# Altium PCB PCB4.PcbDoc (part 3 of 4)
Units mm, origin at the board's own origin, x right, y up, seen from the top; angles counter-clockwise.
Board outline 297 x 150 mm, 2 copper layers (Top Layer, Bottom Layer); 237 components, 147 nets, 681 pads, 111 vias.
Unrouted connection lines stored in the file: 7.
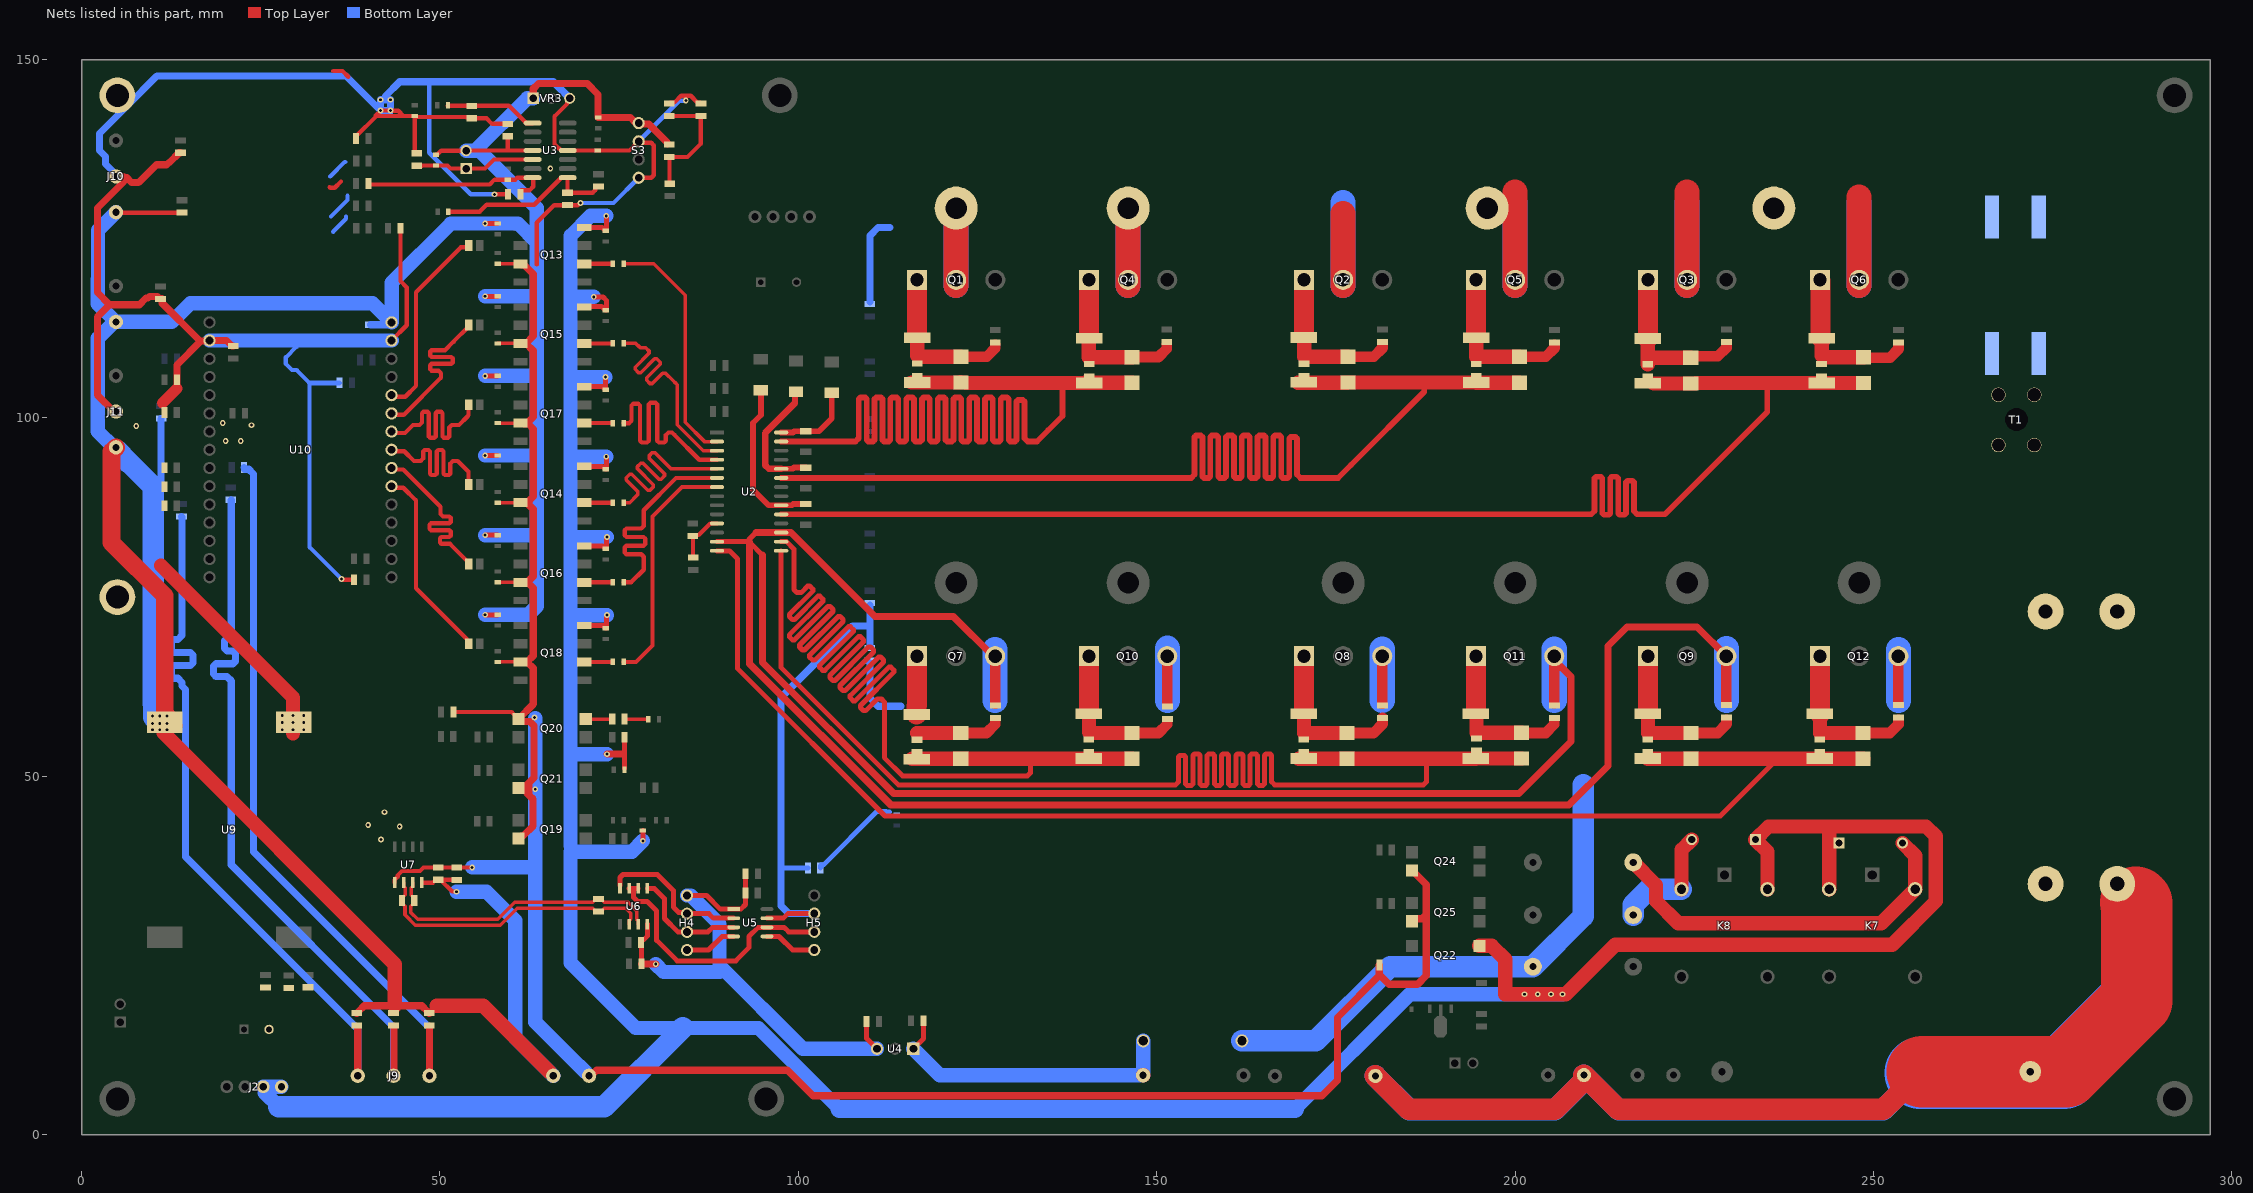
[diagram p2: the nets of this part, all layers, seen from the top]

## Via types
v1: diameter 0.8, hole 0.4, Top Layer to Bottom Layer, 111 vias

## Nets (pads, with @x,y where several pads share a name; then routed paths per layer and width w, separated by ;. In a path a pad name is that pad's centre, name@x,y a point inside that pad or via, vN(x,y) a via of type N, cw(c..) or ccw(c..) an arc to the next point about the centre after c; other vN are vias at no path point) (continued)
+5V_GATE_DRV: C7.2 C8.1 C9.1 C10.1 D18.1 D19.1 J2.1 J2.2 K7.2 K8.5 Q13.8 Q14.8 Q15.8 Q16.8 Q17.8 Q18.8 Q22.4 R65.2 R66.2 R67.2 R77.2 R78.2 R79.2 R83.2 R84.2 R91.2 | length 533.9
  Top Layer w0.7: Q18.8@70.125,71.042 72.71,71.042 73.075,70.677 R79.2@73.125,70.677 73.162,70.677 73.213,70.727 73.213,72.412 v1(73.3,72.5) ; Q16.8@70.125,82.151 72.691,82.151 73.075,81.767 R77.2@73.125,81.767 73.162,81.767 73.213,81.817 73.213,83.313 v1(73.3,83.4) ; Q14.8@70.125,93.26 72.672,93.26 73.075,92.857 R66.2@73.125,92.857 73.15,92.857 73.2,92.907 v1(73.2,94.6) ; Q17.8@70.125,104.369 72.653,104.369 73.075,103.947 73.113,103.984 73.113,105.688 v1(73.1,105.7) ; Q15.8@70.125,115.478 70.199,115.552 72.56,115.552 73.075,115.037 R67.2@73.125,115.037 73.15,115.037 73.2,115.087 73.2,116.417 72.736,116.881 71.481,116.881 v1(71.462,116.9) ; Q13.8@70.125,126.587 72.615,126.587 73.075,126.127 R65.2@73.125,126.127 73.15,126.127 73.2,126.177 v1(73.2,128.2) ; 75.591,53.1 75.766,53.275 ; R91.2@75.766,51.095 75.766,53.275 ; R84.2@75.766,55.455 75.766,53.275 ; v1(78.3,41) R83.2@78.3,42.45
  Top Layer w1: v1(73.3,53.1) 75.591,53.1
  Top Layer w2: Q22.4@195.015,26.345 196.755,26.345 198.6,24.5 198.6,19.6 v1(201.3,19.6) v1(203.15,19.6) v1(205,19.6) v1(206.6,19.6) 207.05,19.6 213.975,26.525 252.625,26.525 258.7,32.6 258.7,41.628 257.328,43 244.1,43 ; K8.5@235.2,34.25 235.2,39.49 D19.1@233.515,41.175 235.34,43 244.1,43 ; K7.2@243.8,34.25 243.8,42.7 244.1,43
  Bottom Layer w2: 27.529,3.9 25.57,5.859 25.57,6.47 J2.2@25.34,6.7 J2.1@27.88,6.7 ; 68.2,40.3 68.2,53 ; v1(71.462,116.9) 68.2,116.9 ; v1(73.1,105.7) 68.5,105.7 68.2,105.4 ; v1(73.2,94.6) 68.5,94.6 68.2,94.3 ; v1(73.2,128.2) 71,128.2 68.2,125.4 68.2,116.9 ; v1(73.3,53.1) 68.3,53.1 68.2,53 ; v1(73.3,72.5) 68.2,72.5 ; v1(73.3,83.4) 68.5,83.4 68.2,83.1 ; v1(78.3,41) 76.8,39.5 68.2,39.5 68.2,24 77.3,14.9 83.9,14.9 94.447,14.9 105.747,3.6 ; 169.3,3.6 185.3,19.6 v1(201.3,19.6) v1(203.15,19.6) v1(205,19.6) v1(206.6,19.6) ; 68.2,53 68.2,72.5 ; 68.2,72.5 68.2,83.1 ; 68.2,83.1 68.2,94.3 ; 68.2,94.3 68.2,105.4 ; 68.2,105.4 68.2,116.9
  Bottom Layer w2.5: 105.747,3.6 169.3,3.6
  Bottom Layer w3: 27.529,3.9 72.9,3.9 83.9,14.9
+5V_MCU: C19.1 C22.1 C23.1 C28.1 J4.2 J10.3 J11.3 J12.1 J13.2 pad.1@5,75 R36.2 R43.2 R44.2 R59.2 R60.2 R61.2 R71.2 R72.2 R73.2 R102.2 R103.2 R104.2 R105.2 R106.2 S3.1 U3.4 U7.8 U9.3 U10.15 VR3.1 | length 512
  Top Layer w0.6: J10.3@4.8,128.7 4.882,128.618 11.35,128.618 11.361,128.628 13.886,128.628 13.9,128.643 R105.2@14,128.643 ; U7.8@47.48,35.175 49.025,35.175 49.425,35.575 C22.1@49.75,35.575 50.075,35.575 C22.1@50.087,35.563 ; R44.2@49.45,136.725 49.6,136.725 50.175,137.3 J4.2@53.65,137.3 53.675,137.325 59.45,137.325 ; v1(52.3,33.9) 52.262,33.938 51.712,33.938 C22.1@50.087,35.563 ; C23.1@52.325,35.55 52.312,35.563 C22.1@50.087,35.563 ; C19.1@59.45,139.3 59.45,137.325 ; U3.4@62.925,137.325 59.45,137.325
  Top Layer w0.7: v1(56.3,72.542) R73.2@58.05,72.542 ; v1(56.3,83.651) R71.2@58.05,83.651 ; v1(56.3,94.76) R60.2@58.05,94.76 ; v1(56.3,105.869) R72.2@58.05,105.869 ; v1(56.3,116.978) R61.2@58.05,116.978 ; v1(56.3,127.125) R59.2@58.05,127.125
  Top Layer w1: R104.2@38.4,16.957 38.475,17.032 38.65,17.032 38.65,17.207 39.443,18 43.21,18 43.21,17.825 ; 43.71,18 47.457,18 48.25,17.207 48.25,17.032 48.425,17.032 R102.2@48.5,16.957 48.575,17.032 48.75,17.032 48.75,17.207 49.543,18 ; VR3.1@63.02,144.6 63.024,144.604 63.024,145.924 63.75,146.65 70.55,146.65 72.064,145.136 R43.2@72.064,141.936 ; R43.2@72.075,141.925 76.575,141.925 77.231,141.269 77.591,141.269 77.859,141.001 79.131,141.001 81.75,138.382 R36.2@81.75,138.207
  Top Layer w2: v1(11.9,57.4) v1(11.9,56.5) 11.85,56.45 11.45,56.05 43.71,23.79 43.71,18 ; U9.3@12.6,57.55 U9.3@13.1,57.05 ; 49.543,18 56.025,18 J12.1@65.318,8.707
  Top Layer w2.5: J11.3@4.8,95.9 4.196,95.296 4.196,82.604 11.6,75.2 11.6,58.7 v1(11.9,58.4)
  Bottom Layer w0.7: 63.5,105.869 64.006,105.869 64.175,105.7
  Bottom Layer w1: v1(9.9,57.4) 10.1,57.6 v1@10.1,58.267 ; 10.033,89.108 11.1,90.175 R106.2@11.1,99.943 ; C28.1@40.3,113 42.721,113 43.061,113.34 U10.15@43.25,113.34
  Bottom Layer w2: J11.3@4.8,95.9 4.5,95.9 2.275,98.125 2.275,111.1 4.575,113.4 J13.2@4.8,113.4 ; J10.3@4.8,128.7 2.3,126.2 2.3,119.378 2.275,119.353 2.275,115.925 J13.2@4.8,113.4 ; v1(9.9,58.4) v1(10.9,57.4) ; v1(52.3,33.9) 56.5,33.9 60.5,29.9 60.5,13.525 J12.1@65.8,8.225 ; J4.2@53.65,137.3 54.9,137.3 62.2,144.6 VR3.1@63.02,144.6 ; 55.2,137.6 63.5,129.3 63.5,124.5 ; v1(56.3,72.542) 62.328,72.542 63.5,73.714 63.5,83.8 ; v1(56.3,83.651) 63.351,83.651 63.5,83.8 ; v1(56.3,94.76) 63.26,94.76 63.5,95 ; v1(56.3,105.869) 63.5,105.869 ; v1(56.3,116.978) 63.478,116.978 63.5,117 ; J13.2@4.8,113.4 9.9,113.4 12.588,113.4 15.188,116 40.59,116 U10.15@43.25,113.34 43.25,118.85 51.525,127.125 v1(56.3,127.125) 60.875,127.125 63.5,124.5 ; 63.5,83.8 63.5,95 ; 63.5,95 63.5,105.869 ; 63.5,105.869 63.5,117 ; 63.5,117 63.5,124.5
  Bottom Layer w3: J11.3@4.957,95.443 6.616,93.784 10.033,90.367 10.033,89.108 10.033,60.157 10.1,60.09 v1@10.1,58.267 ; 10.1,59.2 10.4,58.9 v1(10.9,58.4)
  other v1: 9.9,56.5 10.9,56.5
+5V_VDD: C21.1 C24.1 C25.1 C26.1 C27.1 H4.1 U4.3 U5.1 U6.8 | length 74
  Top Layer w0.7: C26.1@78.1,23.85 78.1,26.775 C24.1@78.05,26.825 78.05,27.15 78.125,27.225 78.45,27.225 78.93,27.705 U6.8@78.93,29.375 ; H4.1@84.475,33.385 87.215,33.385 89.12,31.48 U5.1@90.982,31.48 91.98,31.48 92.625,32.125 C27.1@92.625,36.4 ; C21.1@109.525,15.8 109.525,13.435 U4.3@110.96,12
  Top Layer w1: C26.1@78.15,23.8 v1(80.1,23.8)
  Bottom Layer w2: v1(80.1,23.8) 81.2,22.7 89,22.7 ; H4.1@84.475,33.385 84.976,33.385 89,29.361 89,23.6 100.6,12 U4.3@110.96,12
+48V: C1.1 C2.1 HS1.1 HS2.1 J8.2 Q1.2 Q2.2 Q3.2 Q4.2 Q5.2 Q6.2 R34.2 R47.1 R48.2 R52.2 R96.2 | length 400.7
  Top Layer w3: R47.1@180.5,8.2 185.175,3.525 205.55,3.525 209.6,7.575 J8.2@209.6,8.325 214.4,3.525 251.35,3.525 256.841,8.8
  Top Layer w3.5: Q1.2@122.018,118.5 Q1.2@122.018,119.272 HS2.1@122.018,129.286 ; Q4.2@146,118.5 Q4.2@146,119.272 146,129.268 HS2.1@146.018,129.286 ; Q2.2@176,118.5 Q2.2@176,119.272 176,128.5 ; Q5.2@200,118.5 Q5.2@200,119.272 200,131.5 ; Q3.2@224,118.5 Q3.2@224,119.272 224,131.5 ; Q6.2@248,118.5 Q6.2@248,119.272 248,130.826
  Top Layer w10: 256.841,8.8 276.8,8.8 286.7,18.7 286.7,32.3 286.6,32.4
  Bottom Layer w1: R48.2@109.975,116.2 109.975,125.425 111.125,126.575 112.75,126.575
  Bottom Layer w3: R47.1@180.5,8.2 185.225,3.475 205.55,3.475 209.6,7.525 J8.2@209.6,8.325 214.425,3.5 251.375,3.5 256.5,8.625
  Bottom Layer w3.5: Q1.2@122.018,118.5 Q1.2@122.018,119.272 HS2.1@122.018,129.286 HS2.1@122.018,129.672 ; Q4.2@146,118.5 Q4.2@146,119.272 HS2.1@146,129.672 ; Q2.2@176,118.5 Q2.2@176,119.272 176,130.059 ; Q5.2@200,118.5 Q5.2@200,119.272 200,130.059 ; Q3.2@224,118.5 Q3.2@224,119.272 224,130.059 ; Q6.2@248,118.5 Q6.2@248,119.272 248,130.059
  Bottom Layer w10: 256.5,8.625 R96.2@271.7,8.625 ; R96.2@272.05,8.625 276.5,8.625 285.696,17.821
COM: C1.2 C2.2 C29.2 D16.2 Q7.3 Q8.3 Q9.3 Q10.3 Q11.3 Q12.3 R16.2 R17.2 R18.2 R22.2 R23.2 R24.2 R34.1 R52.1 R56.1 R88.1 R99.1 T1.1 U2.13 U2.17 | length 561
  Top Layer w0.7: U2.13@88.647,82.74 92.815,82.74 92.962,82.887 93.187,83.113 94.085,84.01 ; 93.2,82.65 95,80.85 ; Q7.3@127.149,66.773 Q7.3@127.46,66.773 ; Q11.3@205.46,66.204 Q11.3@205.46,66.773
  Top Layer w1: 93.2,82.65 93.2,65.7 112.875,46.025 207.525,46.025 212.95,51.45 212.95,68.2 215.6,70.85 225.382,70.85 Q9.3@229.46,66.773 ; 94.085,84.01 98.99,84.01 110.7,72.3 121.621,72.3 Q7.3@127.149,66.773 ; 95,80.85 95,65.9 113.3,47.6 200.525,47.6 207.775,54.85 207.775,63.889 Q11.3@205.46,66.204
  Top Layer w1.5: R16.2@127.46,60.175 Q7.3@127.46,66.773 ; R22.2@151.46,60.175 Q10.3@151.46,66.773 ; R17.2@181.46,60.175 Q8.3@181.46,66.773 ; R23.2@205.46,60.2 Q11.3@205.46,66.204 ; 229.46,60.5 Q9.3@229.46,66.773 ; R24.2@253.46,60.3 Q12.3@253.46,66.773
  Bottom Layer w0.7: C29.2@103.057,37.2 103.057,37.525 103.132,37.6 103.457,37.6 110.957,45.1 112.2,45.1 112.3,45 112.7,45
  Bottom Layer w1: R56.1@109.975,65.775 109.975,60.925 111.125,59.775 114.3,59.775
  Bottom Layer w3: D16.2@161.887,13.1 172.2,13.1 182.55,23.45 R99.1@202.475,23.45 209.475,30.45 209.475,48.8
  Bottom Layer w3.5: 127.46,60.586 Q7.3@127.46,66.773 Q7.3@127.46,67.725 ; 151.478,60.586 151.478,66.773 Q10.3@151.478,67.875 ; 181.46,60.586 Q8.3@181.46,66.773 Q8.3@181.46,67.775 ; 205.46,60.586 Q11.3@205.46,66.773 Q11.3@205.46,67.75 ; 229.478,60.586 229.478,66.773 Q9.3@229.478,67.825 ; 253.46,60.586 Q12.3@253.46,66.773 Q12.3@253.46,67.725
D_N: R57.1 R58.1 U6.6 U7.6 | length 40.4
  Top Layer w0.5: U7.6@44.94,35.175 44.94,34.675 45.175,34.44 45.175,33.5 44.675,33 44.675,32.35 45.125,31.9 45.125,30.675 46.55,29.25 58.406,29.25 60.773,31.616 71.334,31.616 71.8,31.15 R57.1@72.125,31.15 72.45,31.15 72.916,31.616 75.927,31.616 76.625,30.918 76.625,30.11 76.39,29.875 U6.6@76.39,29.375
D_P: R57.2 R58.2 U6.7 U7.7 | length 40.4
  Top Layer w0.5: U7.7@46.21,35.175 46.21,34.675 45.975,34.44 45.975,33.432 46.407,33 46.407,32.35 45.925,31.868 45.925,31.006 46.881,30.05 58.075,30.05 60.441,32.416 71.334,32.416 71.8,32.882 R57.2@72.125,32.882 72.45,32.882 72.916,32.416 76.258,32.416 77.425,31.249 77.425,30.11 77.66,29.875 U6.7@77.66,29.375
H03: D3.1 D6.1 pad.2@218.5,105.768 pad.2@242.75,105.793 R3.1 R9.1 U2.19 | length 205.4
  Top Layer w0.8: U2.19@97.603,86.55 210.2,86.55 210.6,86.55 211.069,87.019 211.069,91.576 211.289,91.796 211.949,91.796 212.169,91.576 212.169,86.72 212.389,86.5 213.049,86.5 213.269,86.72 213.269,91.576 213.489,91.796 214.149,91.796 214.369,91.576 214.369,86.72 214.589,86.5 215.249,86.5 215.469,86.72 215.469,91.021 215.689,91.241 216.349,91.241 216.569,91.021 216.569,87.019 217.037,86.55 218.6,86.55 220.875,86.55 235.175,100.85 235.175,104.875
  Top Layer w2: R3.1@219.35,104.8 D3.1@224.45,104.8 ; D3.1@224.55,104.8 225.136,104.8 225.211,104.875 235.175,104.875 R9.1@242.75,104.875 248.55,104.875 248.552,104.877 D6.1@248.6,104.877
HALL_1: J9.3 R102.1 R119.2 | length 102.8
  Top Layer w1: J9.3@48.525,8.225 R102.1@48.525,15.15
  Bottom Layer w1: R119.2@22.682,93.1 22.757,93.025 22.757,92.85 23.314,92.85 23.975,92.189 23.975,39.475 48.525,14.925 J9.3@48.525,8.225
HALL_2: J9.2 R103.1 R122.2 | length 102.6
  Top Layer w1: J9.2@43.525,8.225 43.587,8.288 R103.1@43.587,15.138
  Bottom Layer w1: R122.2@20.885,88.518 20.885,74.625 20.885,69.897 20.3,69.311 19.94,68.951 19.94,67.871 20.3,67.511 21.092,67.511 21.452,67.151 21.452,66.071 21.092,65.711 18.771,65.711 18.411,65.351 18.411,64.271 18.771,63.911 20.3,63.911 20.885,63.325 20.885,62.825 20.885,37.665 43.525,15.025 J9.2@43.525,8.225
HALL_3: J9.1 R104.1 R120.2 | length 102.3
  Top Layer w1: J9.1@38.525,8.225 R104.1@38.525,15.1
  Bottom Layer w1: R120.2@13.925,86.243 13.95,86.243 14.025,86.168 14.025,75.719 14.025,69.672 13.439,69.086 12.861,69.086 12.501,68.726 12.501,67.646 12.861,67.286 15.189,67.286 15.549,66.926 15.549,65.846 15.189,65.486 12.861,65.486 12.501,65.126 12.501,64.046 12.861,63.686 13.439,63.686 14.025,63.1 14.025,62.6 14.5,62.125 14.5,38.775 38.525,14.75 J9.1@38.525,8.225
HIN1: Q13.6 R26.1 | length 4
  Top Layer w0.6: Q13.6@70.125,121.507 R26.1@74.125,121.507
HIN1_GD: R26.2 U2.2 | length 33.7
  Top Layer w0.5: R26.2@75.625,121.507 79.818,121.507 84.225,117.1 84.225,99.383 86.898,96.71 U2.2@88.647,96.71
HIN1_MCU: R62.1 U10.11 | length 27.3
  Top Layer w0.6: U10.11@43.25,103.18 43.46,102.97 45.145,102.97 46.65,104.475 46.65,117.55 52.919,123.819 53.768,123.819 53.993,124.044 R62.1@53.993,124.077
HIN2: Q15.6 R28.1 | length 4
  Top Layer w0.6: Q15.6@70.125,110.398 R28.1@74.125,110.398
HIN2_GD: R28.2 U2.3 | length 33.7
  Top Layer w0.5: R28.2@75.625,110.398 77.327,110.398 77.765,109.96 77.942,109.783 78.356,109.783 78.385,109.812 78.696,109.812 79.163,109.345 79.163,109.034 77.224,107.096 77.224,106.785 77.691,106.318 78.002,106.318 79.941,108.256 80.252,108.256 80.718,107.79 80.718,107.479 78.831,105.591 78.831,105.28 79.297,104.813 79.608,104.813 81.053,106.258 81.467,106.258 82.61,105.115 82.787,104.938 83.1,104.625 83.1,99.05 86.71,95.44 U2.3@88.647,95.44
HIN2_MCU: R64.1 U10.10 | length 26.9
  Top Layer w0.6: U10.10@43.25,100.64 43.46,100.43 44.955,100.43 50.15,105.625 50.15,105.95 50.15,106.25 49.799,106.601 48.816,106.601 48.626,106.791 48.626,107.361 48.816,107.551 51.586,107.551 51.776,107.741 51.776,108.311 51.586,108.501 48.816,108.501 48.626,108.691 48.626,109.261 48.816,109.451 50.707,109.451 51.906,110.65 53.993,112.737 R64.1@53.993,112.962
HIN3: Q17.6 R30.1 | length 4
  Top Layer w0.6: Q17.6@70.125,99.289 R30.1@74.125,99.289
HIN3_GD: R30.2 U2.4 | length 33.7
  Top Layer w0.6: R30.2@75.625,99.289 75.625,99.275 75.675,99.275 76.368,99.275 76.72,99.626 76.72,101.73 76.96,101.97 77.68,101.97 77.92,101.73 77.92,96.811 78.16,96.571 78.88,96.571 79.12,96.811 79.12,101.886 79.36,102.126 80.08,102.126 80.32,101.886 80.32,96.811 80.56,96.571 81.28,96.571 81.52,96.811 81.52,97.63 81.871,97.982 82.368,97.982 82.668,97.682 86.18,94.17 U2.4@88.647,94.17
HIN3_MCU: R75.1 U10.9 | length 26.5
  Top Layer w0.6: U10.9@43.25,98.1 43.46,97.89 45.115,97.89 46.25,99.025 46.85,99.025 47.15,99.025 47.501,99.376 47.501,100.667 47.691,100.857 48.261,100.857 48.451,100.667 48.451,97.421 48.641,97.231 49.211,97.231 49.401,97.421 49.401,100.667 49.591,100.857 50.161,100.857 50.351,100.667 50.351,97.421 50.541,97.231 51.111,97.231 51.301,97.421 51.301,98.674 51.653,99.025 52.65,99.025 53.8,100.175 53.993,100.368 R75.1@53.993,101.847
HO1: D1.1 D4.1 pad.2@116.586,105.87 pad.2@140.6,105.793 R1.1 R7.1 U2.27 | length 205.4
  Top Layer w0.8: U2.27@97.603,96.71 107.569,96.71 107.969,96.71 108.437,97.179 108.437,102.647 108.657,102.867 109.317,102.867 109.537,102.647 109.537,96.93 109.757,96.71 110.417,96.71 110.637,96.93 110.637,102.647 110.857,102.867 111.517,102.867 111.737,102.647 111.737,96.93 111.957,96.71 112.617,96.71 112.837,96.93 112.837,102.647 113.057,102.867 113.717,102.867 113.937,102.647 113.937,96.93 114.157,96.71 114.817,96.71 115.037,96.93 115.037,102.647 115.257,102.867 115.917,102.867 116.137,102.647 116.137,96.93 116.357,96.71 117.017,96.71 117.237,96.93 117.237,102.647 117.457,102.867 118.117,102.867 118.337,102.647 118.337,96.93 118.557,96.71 119.217,96.71 119.437,96.93 119.437,102.647 119.657,102.867 120.317,102.867 120.537,102.647 120.537,96.93 120.757,96.71 121.417,96.71 121.637,96.93 121.637,102.647 121.857,102.867 122.517,102.867 122.737,102.647 122.737,96.93 122.957,96.71 123.617,96.71 123.837,96.93 123.837,102.647 124.057,102.867 124.717,102.867 124.937,102.647 124.937,96.93 125.157,96.71 125.817,96.71 126.037,96.93 126.037,102.647 126.257,102.867 126.917,102.867 127.137,102.647 127.137,96.93 127.357,96.71 128.017,96.71 128.237,96.93 128.237,102.647 128.457,102.867 129.117,102.867 129.337,102.647 129.337,96.93 129.557,96.71 130.217,96.71 130.437,96.93 130.437,102.283 130.657,102.503 131.317,102.503 131.537,102.283 131.537,97.179 132.006,96.71 133.285,96.71 134.811,98.236 136.85,100.275 136.85,104.875
  Top Layer w2: R1.1@115.8,104.952 R1.1@116.586,104.952 122.577,104.952 122.625,105 D1.1@122.675,105 ; D1.1@122.725,104.952 123.311,104.952 123.388,104.875 136.85,104.875 R7.1@140.6,104.875 ; R7.1@140,104.893 D4.1@146.549,104.893
HO2: D2.1 D5.1 pad.2@170.558,105.835 pad.2@194.558,105.818 R2.1 R8.1 U2.23 | length 205.4
  Top Layer w0.8: U2.23@97.603,91.63 154.4,91.63 154.8,91.63 155.269,92.099 155.269,97.334 155.489,97.554 156.149,97.554 156.369,97.334 156.369,91.85 156.589,91.63 157.249,91.63 157.469,91.85 157.469,97.334 157.689,97.554 158.349,97.554 158.569,97.334 158.569,91.85 158.789,91.63 159.449,91.63 159.669,91.85 159.669,97.334 159.889,97.554 160.549,97.554 160.769,97.334 160.769,91.85 160.989,91.63 161.649,91.63 161.869,91.85 161.869,97.334 162.089,97.554 162.749,97.554 162.969,97.334 162.969,91.85 163.189,91.63 163.849,91.63 164.069,91.85 164.069,97.334 164.289,97.554 164.949,97.554 165.169,97.334 165.169,91.85 165.389,91.63 166.049,91.63 166.269,91.85 166.269,97.334 166.489,97.554 167.149,97.554 167.369,97.334 167.369,91.85 167.589,91.63 168.249,91.63 168.469,91.85 168.469,97.128 168.689,97.348 169.349,97.348 169.569,97.128 169.569,92.099 170.037,91.63 175.305,91.63 177.1,93.425 187.325,103.65 187.325,104.952
  Top Layer w2: R2.1@169.7,104.927 D2.1@176.577,104.927 ; D2.1@176.657,104.952 187.325,104.952 194.539,104.952 194.564,104.927 D5.1@200.577,104.927
LIN1: Q14.6 R27.1 | length 4
  Top Layer w0.6: Q14.6@70.125,88.18 R27.1@74.125,88.18
LIN1_GD: R27.2 U2.5 | length 33.7
  Top Layer w0.5: R27.2@75.625,88.18 76.455,88.18 77.425,89.15 77.602,89.327 77.602,89.741 75.991,91.352 75.991,91.663 76.457,92.13 76.769,92.13 78.993,89.906 79.304,89.906 79.77,90.372 79.77,90.684 77.546,92.908 77.546,93.219 78.013,93.685 78.324,93.685 80.548,91.461 80.859,91.461 81.326,91.928 81.326,92.239 79.17,94.395 79.17,94.706 79.637,95.173 79.948,95.173 82.221,92.9 83.65,92.9 U2.5@88.647,92.9
LIN1_MCU: R63.1 U10.8 | length 26.4
  Top Layer w0.6: U10.8@43.25,95.56 43.46,95.35 45.025,95.35 46.375,94 47,94 47.3,94 47.651,94.351 47.651,95.334 47.841,95.524 48.411,95.524 48.601,95.334 48.601,92.229 48.791,92.039 49.361,92.039 49.551,92.229 49.551,95.334 49.741,95.524 50.311,95.524 50.501,95.334 50.501,92.229 50.691,92.039 51.261,92.039 51.451,92.229 51.451,93.649 51.803,94 52.475,94 53.95,92.525 53.993,92.482 R63.1@53.993,90.732
LIN2: Q16.6 R29.1 | length 4
  Top Layer w0.6: Q16.6@70.125,77.071 R29.1@74.125,77.071
LIN2_GD: R29.2 U2.6 | length 33.7
  Top Layer w0.6: R29.2@75.625,77.071 76.671,77.071 78.423,78.823 78.423,80.334 78.423,80.634 78.072,80.985 76.005,80.985 75.765,81.225 75.765,81.945 76.005,82.185 78.397,82.185 78.637,82.425 78.637,83.145 78.397,83.385 76.024,83.385 75.784,83.625 75.784,84.345 76.024,84.585 78.072,84.585 78.423,84.936 78.423,86.537 78.423,87.123 82.93,91.63 U2.6@88.647,91.63
LIN2_MCU: R74.1 U10.7 | length 27.2
  Top Layer w0.6: U10.7@43.25,93.02 43.46,92.81 44.89,92.81 50.075,87.625 50.075,86.9 50.075,86.6 50.426,86.249 51.302,86.249 51.492,86.059 51.492,85.489 51.302,85.299 48.741,85.299 48.551,85.109 48.551,84.539 48.741,84.349 51.302,84.349 51.492,84.159 51.492,83.589 51.302,83.399 50.183,83.399 49.993,83.209 49.993,82.639 50.183,82.449 51.386,82.449 51.76,82.075 53.993,79.842 R74.1@53.993,79.617
LIN3: Q18.6 R31.1 | length 4
  Top Layer w0.6: Q18.6@70.125,65.962 R31.1@74.125,65.962
LIN3_GD: R31.2 U2.7 | length 33.7
  Top Layer w0.6: R31.2@75.625,65.962 75.625,65.95 77.35,65.95 79.65,68.25 79.65,86.256 83.754,90.36 U2.7@88.647,90.36
LIN3_MCU: R76.1 U10.6 | length 27.3
  Top Layer w0.6: U10.6@43.25,90.48 43.46,90.27 44.88,90.27 46.65,88.5 46.65,76.25 53.768,69.132 53.768,68.727 R76.1@53.993,68.502
LO1: D7.1 D10.1 pad.2@116.55,53.375 pad.2@140.5,53.393 R13.1 R19.1 U2.16 | length 205.4
  Top Layer w0.7: U2.16@97.603,82.74 98.36,82.74 99.4,81.7 99.4,76.538 99.4,76.043 99.81,75.633 100.39,75.633 101.305,76.548 101.588,76.548 102.012,76.124 102.012,75.841 98.744,72.573 98.744,72.29 99.169,71.866 99.452,71.866 102.719,75.134 103.002,75.134 103.426,74.709 103.426,74.426 98.744,69.745 98.744,69.462 99.169,69.038 99.452,69.038 104.133,73.719 104.416,73.719 104.84,73.295 104.84,73.012 100.151,68.323 100.151,68.04 100.575,67.616 100.858,67.616 105.548,72.305 105.83,72.305 106.255,71.881 106.255,71.598 101.565,66.909 101.565,66.626 101.99,66.202 102.272,66.202 106.962,70.891 107.245,70.891 107.669,70.467 107.669,70.184 102.98,65.495 102.98,65.212 103.404,64.787 103.687,64.787 108.376,69.477 108.659,69.477 109.083,69.052 109.083,68.77 104.394,64.08 104.394,63.797 104.818,63.373 105.101,63.373 109.79,68.063 110.073,68.063 110.497,67.638 110.497,67.355 105.808,62.666 105.808,62.383 106.232,61.959 106.515,61.959 111.204,66.648 111.487,66.648 111.911,66.224 111.911,65.941 107.222,61.252 107.222,60.969 107.646,60.545 107.929,60.545 112.619,65.234 112.901,65.234 113.326,64.81 113.326,64.527 108.673,59.875 108.673,59.592 109.098,59.168 109.381,59.168 111.01,60.797 111.59,60.797 112,60.387 112,56.6 112,52.6 114.525,50.075 131.965,50.075 132.375,50.485 132.375,52.452
  Top Layer w2: R13.1@115.9,52.452 D7.1@122.657,52.452 132.375,52.452 140.477,52.452 R19.1@140.5,52.475 146.486,52.475 146.509,52.452 D10.1@146.536,52.452
LO2: D8.1 D11.1 pad.2@170.5,53.393 pad.2@194.6,53.568 R14.1 R20.1 U2.15 | length 205.4
  Top Layer w0.7: U2.15@97.603,81.47 97.603,65.172 113.95,48.825 152.129,48.825 152.63,48.825 153.04,49.235 153.04,52.709 153.24,52.909 153.84,52.909 154.04,52.709 154.04,48.95 154.24,48.75 154.84,48.75 155.04,48.95 155.04,52.933 155.24,53.133 155.84,53.133 156.04,52.933 156.04,48.95 156.24,48.75 156.84,48.75 157.04,48.95 157.04,52.933 157.24,53.133 157.84,53.133 158.04,52.933 158.04,48.95 158.24,48.75 158.84,48.75 159.04,48.95 159.04,52.933 159.24,53.133 159.84,53.133 160.04,52.933 160.04,48.95 160.24,48.75 160.84,48.75 161.04,48.95 161.04,52.933 161.24,53.133 161.84,53.133 162.04,52.933 162.04,48.95 162.24,48.75 162.84,48.75 163.04,48.95 163.04,52.933 163.24,53.133 163.84,53.133 164.04,52.933 164.04,48.95 164.24,48.75 164.84,48.75 165.04,48.95 165.04,52.933 165.24,53.133 165.84,53.133 166.04,52.933 166.04,49.235 166.45,48.825 167.8,48.825 187.215,48.825 187.625,49.235 187.625,52.452
  Top Layer w2: R14.1@169.8,52.452 D8.1@176.559,52.452 187.625,52.452 194.477,52.452 R20.1@194.5,52.475 ; R20.1@193.9,52.5 D11.1@200.9,52.5
LO3: D9.1 D12.1 pad.2@218.5,53.393 pad.2@242.5,53.393 R15.1 R21.1 U2.14 | length 205.4
  Top Layer w0.7: U2.14@88.647,81.47 90.38,81.47 91.525,80.325 91.525,65.025 112.075,44.475 228.625,44.475 236.075,51.925 236.075,52.452
  Top Layer w2: R15.1@218.5,52.475 218.545,52.475 218.568,52.452 D9.1@224.559,52.452 236.075,52.452 R21.1@242.477,52.452 ; R21.1@242.5,52.475 R21.1@242.477,52.452 ; D12.1@248.559,52.452 R21.1@242.477,52.452
MCU_GND: C15.2 C16.2 C17.2 C18.2 C19.2 C22.2 C23.2 C28.2 J10.2 J11.2 J12.2 pad.1@5,145 Q13.3 Q14.3 Q15.3 Q16.3 Q17.3 Q18.3 Q19.2 Q20.3 Q21.2 Q24.2 Q25.2 R40.1 R41.1 R45.1 R46.2 R68.1 R69.1 R70.1 R80.1 R81.1 R82.1 R94.1 R107.1 R108.1 R111.1 R112.1 R116.1 R117.1 R118.1 R126.1 R127.1 R128.1 R129.1 R130.1 R131.1 S3.2 S3.4 U3.11 U7.5 U9.4 U10.14 U10.17 VR3.3 | length 767.9
  Top Layer w0.5: R82.1@58.05,65.962 Q18.3@61.225,65.962 ; R80.1@58.05,77.071 Q16.3@61.225,77.071 ; R69.1@58.05,88.18 Q14.3@61.225,88.18 ; R81.1@58.05,99.289 Q17.3@61.225,99.289 ; R70.1@58.05,110.398 Q15.3@61.225,110.398 ; R68.1@58.05,121.507 Q13.3@61.225,121.507
  Top Layer w0.6: R129.1@11.55,100.775 11.55,102.1 ; 34.6,132.2 34.687,132.113 35.313,132.113 36.202,133.002 ; 35.1,148.4 36.4,148.4 37.2,147.6 ; v1(36.263,77.518) 36.317,77.518 36.41,77.425 R116.1@38.018,77.425 ; R128.1@38.3,139.3 41.125,142.125 44.925,142.125 ; 41.052,142.198 41.7,142.846 v1(41.7,142.9) v1(43.1,142.9) 43.138,142.862 44.188,142.862 44.925,142.125 ; U10.14@43.25,110.8 45.375,112.925 45.375,118.212 44.5,119.087 R111.1@44.5,126.45 ; U7.5@43.67,35.175 43.67,35.575 44.09,35.995 44.09,36.174 44.716,36.799 47.224,36.799 47.707,37.282 C23.2@52.325,37.282 52.334,37.291 54.483,37.291 v1(54.492,37.3) ; R41.1@46.625,142.125 46.75,142 53.649,142 53.706,141.943 54.325,141.943 C17.2@54.45,141.818 56.495,141.818 57.28,141.032 C19.2@59.45,141.032 ; R45.1@46.75,136.925 46.6,136.925 46.475,137.05 R41.1@46.475,142.125 44.925,142.125 ; R131.1@51.875,58.975 59.995,58.975 Q20.3@60.96,58.01 ; v1(57.6,131.2) C18.2@59.518,131.2 ; 63.5,121.4 63.5,127.25 65.943,129.693 69.238,129.693 69.546,130 v1(69.6,130) ; VR3.3@68.1,144.6 68.1,144.343 67.716,143.959 67.716,143.816 65.975,142.075 65.975,138.201 66.531,137.645 66.578,137.645 66.898,137.325 U3.11@67.825,137.325 R46.2@72.025,137.325 76.455,137.325 S3.2@77.725,138.595 77.935,138.385 79.474,138.385 79.825,138.033 79.825,133.866 79.474,133.515 S3.4@77.725,133.515 ; R40.1@82.018,143.857 82.16,144 82.7,144 83.647,144.947 84.985,144.947 85.95,143.982 86.275,143.982 C15.2@86.4,143.857 ; v1(84.3,144.3) 84.3,144.9
  Top Layer w1: J11.2@4.8,100.9 4.529,100.9 3.265,102.164 3.236,102.164 2.2,103.2 2.2,114.1 3.9,115.8 ; J10.2@4.8,133.7 5.859,133.7 5.859,132.923 2.211,129.275 2.211,117.489 3.9,115.8 ; 6.309,133.509 6.964,132.854 7.964,132.854 10.436,135.325 11.85,135.325 12.185,135.66 12.285,135.66 13.625,137 R107.1@13.8,137 ; 11.05,102.1 11.3,102.1 11.55,102.1 ; 13.3,104.1 R108.1@13.3,105.325 13.3,107.4 16.638,110.738 17.788,110.738 U10.17@17.85,110.8 20.225,110.8 21,110.025 R117.1@21.175,110.025 ; 16.316,110.934 11.25,116 11.25,116.55 11.175,116.625 10.925,116.625 10.6,116.95 9.488,116.95 9.263,116.725 8.997,116.725 8.072,115.8 3.9,115.8 ; Q19.2@60.96,41.33 60.96,41.345 61.3,41.685 61.601,41.685 63,43.084 63,46.8 62.388,47.413 ; Q21.2@60.96,48.38 Q21.2@61.3,48.38 ; Q20.3@60.96,57.995 60.96,57.98 61.3,57.64 62.514,57.64 63.1,57.054 63.1,49.8 62.444,49.144 ; Q20.3@60.96,58.01 63.025,60.075 63.025,65.099 62.162,65.962 63.025,66.825 63.025,76.275 62.364,76.936 ; Q18.3@61.225,65.962 Q18.3@62.038,65.962 ; Q16.3@61.225,77.071 Q16.3@61.59,77.071 ; Q14.3@61.225,88.18 62.12,88.18 63.025,87.275 63.025,77.925 62.306,77.206 Q16.3@61.88,77.206 ; Q17.3@61.225,99.289 61.725,99.289 61.725,99.154 62.346,99.154 63.025,98.475 63.025,89.025 Q14.3@62.18,88.18 ; Q15.3@61.225,110.398 Q15.3@61.998,110.398 ; Q13.3@61.225,121.507 61.36,121.372 61.725,121.372 63.025,120.072 63.025,111.425 Q15.3@61.998,110.398 ; Q21.2@61.72,48.38 Q21.2@61.3,48.38 ; Q21.2@61.788,48.488 62.444,49.144 ; Q17.3@62.189,99.289 63.025,100.125 63.025,109.375 62.002,110.398 Q15.3@61.998,110.398 ; J12.2@70.8,8.225 71.071,8.225 71.846,9 98.5,9 102.05,5.45 173.05,5.45 175.2,7.6 175.2,16.35 181.05,22.2 ; R94.1@181.05,23.675 181.05,22.2 ; Q25.2@185.635,29.78 185.635,29.795 185.975,30.135 187.014,30.135 187.6,30.721 ; Q24.2@185.635,36.88 185.635,36.865 187.6,34.9 187.6,30.721 ; Q21.2@61.3,48.38 61.3,48.025 61.775,48.025 62.388,47.413 ; 62.388,47.413 62.444,47.469 62.444,49.144 ; 181.05,22.2 181.125,22.275 182.4,21 186.4,21 187.6,22.2 187.6,30.721
  Top Layer w1.5: 11.3,102.1 13.3,104.1
  Top Layer w2: 11.075,79.415 29.5,60.99 v1(29.5,58.5) ; 29.5,56 U9.4@29.5,57 ; v1(29.5,57.5) U9.4@29.5,57 ; U9.4@29.6,57.55 29.6,57.1 U9.4@29.5,57
  Bottom Layer w0.6: 30,110.3 30,109.956 28.5,108.456 28.5,107.544 29.344,106.7 30,106.7 31.8,104.9 31.8,81.981 v1(36.263,77.518) ; 34.7,133.7 36.7,135.7 36.8,135.7 ; 34.8,128.1 37.1,130.4 37.1,131 ; 35.1,126 36.9,127.8 36.9,128.1 ; v1(43.1,142.9) 43.138,142.862 43.138,142.362 ; 48.5,146.9 48.5,137 54.3,131.2 v1(57.6,131.2) ; v1(69.6,130) 74.21,130 S3.4@77.725,133.515 ; S3.2@77.725,138.595 83.392,144.262 84.262,144.262 v1(84.3,144.3)
  Bottom Layer w0.7: 30,110.3 30,110.8 ; 31.8,104.9 R118.1@35.975,104.9
  Bottom Layer w1: J10.2@4.8,133.7 4.8,133.971 3.329,135.442 3.329,136.471 2.5,137.3 2.5,139.7 6.4,143.6 10.5,147.7 36.9,147.7 v1(41.7,142.9) ; VR3.3@68.1,144.6 65.8,146.9 48.5,146.9 44.4,146.9 42.4,144.9 42.4,144.4 ; v1(41.7,142.9) v1(41.7,144.4) 42.4,144.4 ; v1(41.7,142.9) v1(43.1,142.9) v1(43.1,144.4) 42.4,144.4
  Bottom Layer w2: U10.17@17.85,110.8 30,110.8 U10.14@43.25,110.8 ; v1(54.492,37.3) 63.292,37.3 ; v1@63.292,58.1 v1(63.292,48.2) 63.292,37.3 ; J12.2@70.32,8.705 68.291,10.734 63.292,15.733 63.292,37.3
  other v1: 41.777,41.207 44.377,43.007 39.977,43.207 42.277,45.007 28,56.5 29.5,56.5 31,56.5 28,57.5 31,57.5 63.192,58.2 28,58.5 31,58.5 20.1,96.8 22.2,96.8 7.636,98.883 23.7,99 19.7,99.3 65.4,134.8
NetC3_1: C3.1 D15.1 U2.28 | length 11.5
  Top Layer w0.8: U2.28@97.603,97.98 99.255,97.98 99.435,98.16 C3.1@101,98.16 102.885,98.16 104.675,99.95 104.675,103.5 D15.1@104.65,103.525
NetC4_1: C4.1 D14.1 U2.24 | length 18
  Top Layer w0.8: U2.24@97.603,92.9 99.22,92.9 99.4,93.08 C4.1@101.025,93.08
  Top Layer w0.9: U2.24@97.603,92.9 95.877,92.9 95.35,93.427 95.35,97.896 99.532,102.077 99.532,103.507 D14.1@99.675,103.65
NetC5_1: C5.1 R25.2 U2.11 | length 7.1
  Top Layer w0.6: C5.1@85.325,80.55 85.288,80.587 85.288,83.51 R25.2@85.25,83.548 85.375,83.673 86.098,83.673 87.705,85.28 U2.11@88.647,85.28
NetC6_1: C6.1 D13.1 U2.20 | length 22.7
  Top Layer w0.8: D13.1@94.75,103.875 94.775,103.85 94.775,100.413 93.675,99.313 93.675,89.975 95.83,87.82 U2.20@97.603,87.82 99.095,87.82 99.275,88 C6.1@101,88
NetC15_1: C15.1 R36.1 R37.1 R40.2 | length 17.2
  Top Layer w0.6: R40.2@82,142.143 82.018,142.125 86.1,142.125 C15.1@86.4,142.125 86.4,138.276 84.524,136.4 R36.1@82,136.4 82.025,136.375 82.025,132.7 R37.1@82.05,132.675
NetC16_1: C16.1 R35.2 R38.1 U3.8 | length 25.6
  Top Layer w0.6: R38.1@51.175,128.775 55.531,128.775 56.506,129.75 63.16,129.75 66.925,133.515 U3.8@67.825,133.515 67.8,133.49 C16.1@67.8,131.425 71.299,131.425 71.65,131.776 71.65,132.143 71.775,132.268 R35.2@72.1,132.268
NetC17_1: C17.1 R39.1 U3.1 | length 12.9
  Top Layer w0.6: R39.1@51.125,143.6 51.1,143.575 51.1,143.55 C17.1@54.45,143.55 59.61,143.55 62.025,141.135 U3.1@62.925,141.135
NetC18_1: C18.1 R42.2 R121.2 U3.7 | length 27.3
  Top Layer w0.6: R121.2@40.032,132.725 40.032,132.7 40.157,132.575 56.95,132.575 57.625,133.25 R42.2@59.45,133.25 ; R42.2@59.3,133.25 60.516,133.25 60.775,133.509 61.979,133.509 61.979,133.496 62.906,133.496 U3.7@62.925,133.515 62.971,133.469 63,133.469 63,132.265 62.485,131.75 61.375,131.75 61.25,131.625 C18.1@61.25,131.2
NetC20_1: C20.1 D16.1 R49.1 U4.1 | length 42.9
  Top Layer w0.7: U4.1@116.04,12 117.475,13.435 C20.1@117.475,15.9
  Top Layer w2: R49.1@148.1,8.3 R49.1@148.113,8.288
  Bottom Layer w2: U4.1@116.04,12 119.74,8.3 R49.1@148.1,8.3 148.1,12.802 148.113,12.814 D16.1@148.113,13.1
NetC29_1: C29.1 H5.2 R55.2 R56.2 U5.7 | length 66.9
  Top Layer w0.7: U5.7@95.618,30.21 97.894,30.21 98.534,30.85 H5.2@102.225,30.85
  Bottom Layer w0.7: 97.6,37.4 97.8,37.2 C29.1@101.325,37.2
  Bottom Layer w1: H5.2@102.225,30.85 98.65,30.85 97.6,31.9 97.6,37.4 97.6,61.05 107.55,71 109.725,71 ; R56.2@109.975,68.125 R55.2@109.975,73.9
NetD1_2: D1.2 pad.1@116.586,107.602 Q1.1 R1.2 R4.1 | length 22.5
  Top Layer w1.5: D1.2@122.675,108.552 126.274,108.552 127.478,109.756 R4.1@127.478,110.2
  Top Layer w2: 116.558,112.169 116.558,111.202 116.607,111.153 116.607,108.722 116.777,108.552 D1.2@122.675,108.552
  Top Layer w2.8: 116.558,112.169 Q1.1@116.558,119.272
NetD2_2: D2.2 pad.1@170.558,107.567 Q2.1 R2.2 R5.1 | length 22.1
  Top Layer w1.5: D2.2@176.675,108.527 180.274,108.527 181.5,109.753 R5.1@181.5,110.3
  Top Layer w2: R2.2@170.5,111.225 170.558,111.167 170.558,108.552 D2.2@176.657,108.552
  Top Layer w2.8: Q2.1@170.54,119.272 170.54,119.265 170.558,119.248 R2.2@170.558,111.875
NetD3_2: D3.2 pad.1@218.5,107.5 Q3.1 R3.2 R6.1 | length 22.9
  Top Layer w1.5: D3.2@224.5,108.4 224.702,108.602 228.274,108.602 229.478,109.806 R6.1@229.478,110.25
  Top Layer w2: pad.1@218.503,107.503 R3.2@218.503,111.097 ; 219.4,108.4 D3.2@224.5,108.4
  Top Layer w2.8: R3.2@218.5,111.1 218.5,111.471 218.54,111.511 Q3.1@218.54,119.272
NetD4_2: D4.2 pad.1@140.6,107.525 Q4.1 R7.2 R10.1 | length 22.1
  Top Layer w1.5: D4.2@146.549,108.493 150.246,108.493 151.411,109.658 R10.1@151.411,110.2
  Top Layer w2: R7.2@140.53,111.202 140.53,108.488 145.908,108.488 145.913,108.493 D4.2@146.543,108.493
  Top Layer w2.8: R7.2@140.53,111.775 140.53,119.214 140.53,119.262 Q4.1@140.54,119.272
NetD5_2: D5.2 pad.1@194.558,107.55 Q5.1 R8.2 R11.1 | length 22.6
  Top Layer w1.5: D5.2@200.577,108.527 204.274,108.527 205.5,109.753 R11.1@205.5,110.175
  Top Layer w2: 194.558,112.144 194.558,111.202 194.558,108.525 199.939,108.525 199.941,108.527 D5.2@200.575,108.527
  Top Layer w2.8: 194.558,112.144 Q5.1@194.558,119.248
NetD6_2: D6.2 pad.1@242.75,107.525 Q6.1 R9.2 R12.1 | length 22.4
  Top Layer w1.5: D6.2@248.7,108.477 248.775,108.402 252.296,108.402 253.5,109.606 R12.1@253.5,110.1
  Top Layer w2: R9.2@242.75,111.125 242.771,111.104 242.771,108.708 243.002,108.477 D6.2@248.602,108.477
  Top Layer w2.8: Q6.1@242.54,119.272 242.54,119.241 242.583,119.198 242.583,111.292 R9.2@242.75,111.125
NetD7_2: D7.2 pad.1@116.55,55.107 Q7.1 R13.2 R16.1 | length 20.6
  Top Layer w1.5: D7.2@122.657,56.052 126.256,56.052 127.46,57.256 R16.1@127.46,57.7
  Top Layer w2: R13.2@116.5,58.625 R13.2@117.1,58.625 ; 116.55,56.052 D7.2@122.657,56.052
  Top Layer w2.8: R13.2@116.5,58.625 116.5,59.841 116.54,59.881 Q7.1@116.54,66.773
NetD8_2: D8.2 pad.1@170.5,55.125 Q8.1 R14.2 R17.1 | length 21.5
  Top Layer w1.5: D8.2@177.165,56.052 180.256,56.052 181.5,57.296 R17.1@181.5,58.125
  Top Layer w2: R14.2@170.54,58.497 170.54,56.046 175.917,56.046 175.923,56.052 D8.2@176.553,56.052
  Top Layer w2.8: R14.2@170.54,59.375 Q8.1@170.54,66.773
NetD9_2: D9.2 pad.1@218.5,55.125 Q9.1 R15.2 R18.1 | length 22.1
  Top Layer w1.5: D9.2@224.657,56.052 228.256,56.052 229.5,57.296 R18.1@229.5,57.9
  Top Layer w2: R15.2@218.54,58.725 218.54,56.053 D9.2@223.923,56.053 ; D9.2@223.923,56.052 D9.2@224.559,56.052
  Top Layer w2.8: R15.2@218.54,59.375 Q9.1@218.54,66.773
NetD10_2: D10.2 pad.1@140.5,55.125 Q10.1 R19.2 R22.1 | length 21.5
  Top Layer w1.5: D10.2@146.657,56.052 150.256,56.052 151.46,57.256 R22.1@151.46,57.7
  Top Layer w2: R19.2@140.546,58.475 140.546,56.154 140.648,56.052 D10.2@146.559,56.052
  Top Layer w2.8: R19.2@140.54,59.375 Q10.1@140.54,66.773
NetD11_2: D11.2 pad.1@194.6,55.3 Q11.1 R20.2 R23.1 | length 21.7
  Top Layer w1.5: D11.2@200.9,56.1 200.948,56.052 204.256,56.052 205.46,57.256 R23.1@205.46,57.7
  Top Layer w2: R20.2@194.6,58.9 194.6,56.1 D11.2@200.9,56.1
  Top Layer w2.8: 194.54,59.669 Q11.1@194.54,66.773
NetD12_2: D12.2 pad.1@242.5,55.125 Q12.1 R21.2 R24.1 | length 22.6
  Top Layer w1.5: D12.2@248.657,56.052 252.256,56.052 253.475,57.271 R24.1@253.475,57.85
  Top Layer w2: R21.2@242.54,58.725 242.54,56.056 247.919,56.056 247.923,56.052 D12.2@248.555,56.052
  Top Layer w2.8: R21.2@242.54,58.725 Q12.1@242.54,66.773
NetD17_1: D17.1 R33.1 | length 3.3
  Top Layer w0.5: D17.1@75.766,57.995 R33.1@79.05,57.995
NetD17_2: D17.2 Q20.2 | length 3.7
  Top Layer w0.5: Q20.2@70.34,57.995 D17.2@74.034,57.995
NetD18_2: D18.2 K7.5 R97.2 | length 53.3
  Top Layer w2: R97.2@216.475,38 219.657,34.818 219.657,32.612 222.744,29.525 251.075,29.525 K7.5@255.8,34.25 255.8,38.94 D18.2@254.04,40.7
NetD19_2: D19.2 K8.2 R98.2 | length 16.6
  Top Layer w2: K8.2@223.2,34.25 223.2,39.74 D19.2@224.635,41.175
  Bottom Layer w3: R98.2@216.475,30.65 216.475,32.1 218.625,34.25 K8.2@223.2,34.25
NetH4_2: H4.2 U5.2 U6.4 | length 21
  Top Layer w0.7: U6.4@75.12,34.775 75.12,35.89 75.53,36.3 80.325,36.3 82.55,34.075 82.55,31.775 83.289,31.036 84.284,31.036 H4.2@84.475,30.845 87.505,30.845 88.14,30.21 U5.2@90.982,30.21
NetH4_3: H4.3 U5.3 U6.1 | length 16.4
  Top Layer w0.7: U6.1@78.93,34.375 78.975,34.33 79.92,34.33 81.325,32.925 81.325,30.175 83.191,28.309 84.471,28.309 H4.3@84.475,28.305 87.405,28.305 88.04,28.94 U5.3@90.982,28.94
NetH4_4: H4.4 U5.4 | length 7.3
  Top Layer w0.7: H4.4@84.475,25.765 87.465,25.765 89.37,27.67 U5.4@90.982,27.67
NetH5_3: H5.3 U5.6 U6.2 U6.3 | length 36.9
  Top Layer w0.7: U6.3@76.39,34.375 77.025,34.375 ; U6.2@77.66,34.375 77.025,34.375 ; H5.3@102.225,28.31 98.64,28.31 98.01,28.94 94.39,28.94 93.1,27.65 93.1,26.1 91.265,24.265 83.085,24.265 80.225,27.125 80.225,31.225 78.875,32.575 77.55,32.575 77.025,33.1 77.025,34.375
NetH5_4: H5.4 U5.5 | length 7.4
  Top Layer w0.7: U5.5@95.618,27.67 97.305,27.67 99.205,25.77 H5.4@102.225,25.77
NetJ4_1: J4.1 R44.1 R45.2 U3.5 | length 16.9
  Top Layer w0.6: R45.2@46.75,135.193 47.519,135.193 47.551,135.225 R44.1@49.45,135.225 51.061,135.225 51.486,134.8 J4.1@53.65,134.8 56.287,134.8 57.542,136.055 U3.5@62.925,136.055